# Altium PCB BMS.PcbDoc (part 3 of 3)
Units mm, origin at the board's own origin, x right, y up, seen from the top; angles counter-clockwise.
Board outline 84 x 70 mm, 4 copper layers (PWR, GND1, GND2, SIG), stack 1.586 mm thick; 200 components, 151 nets, 637 pads, 135 vias.
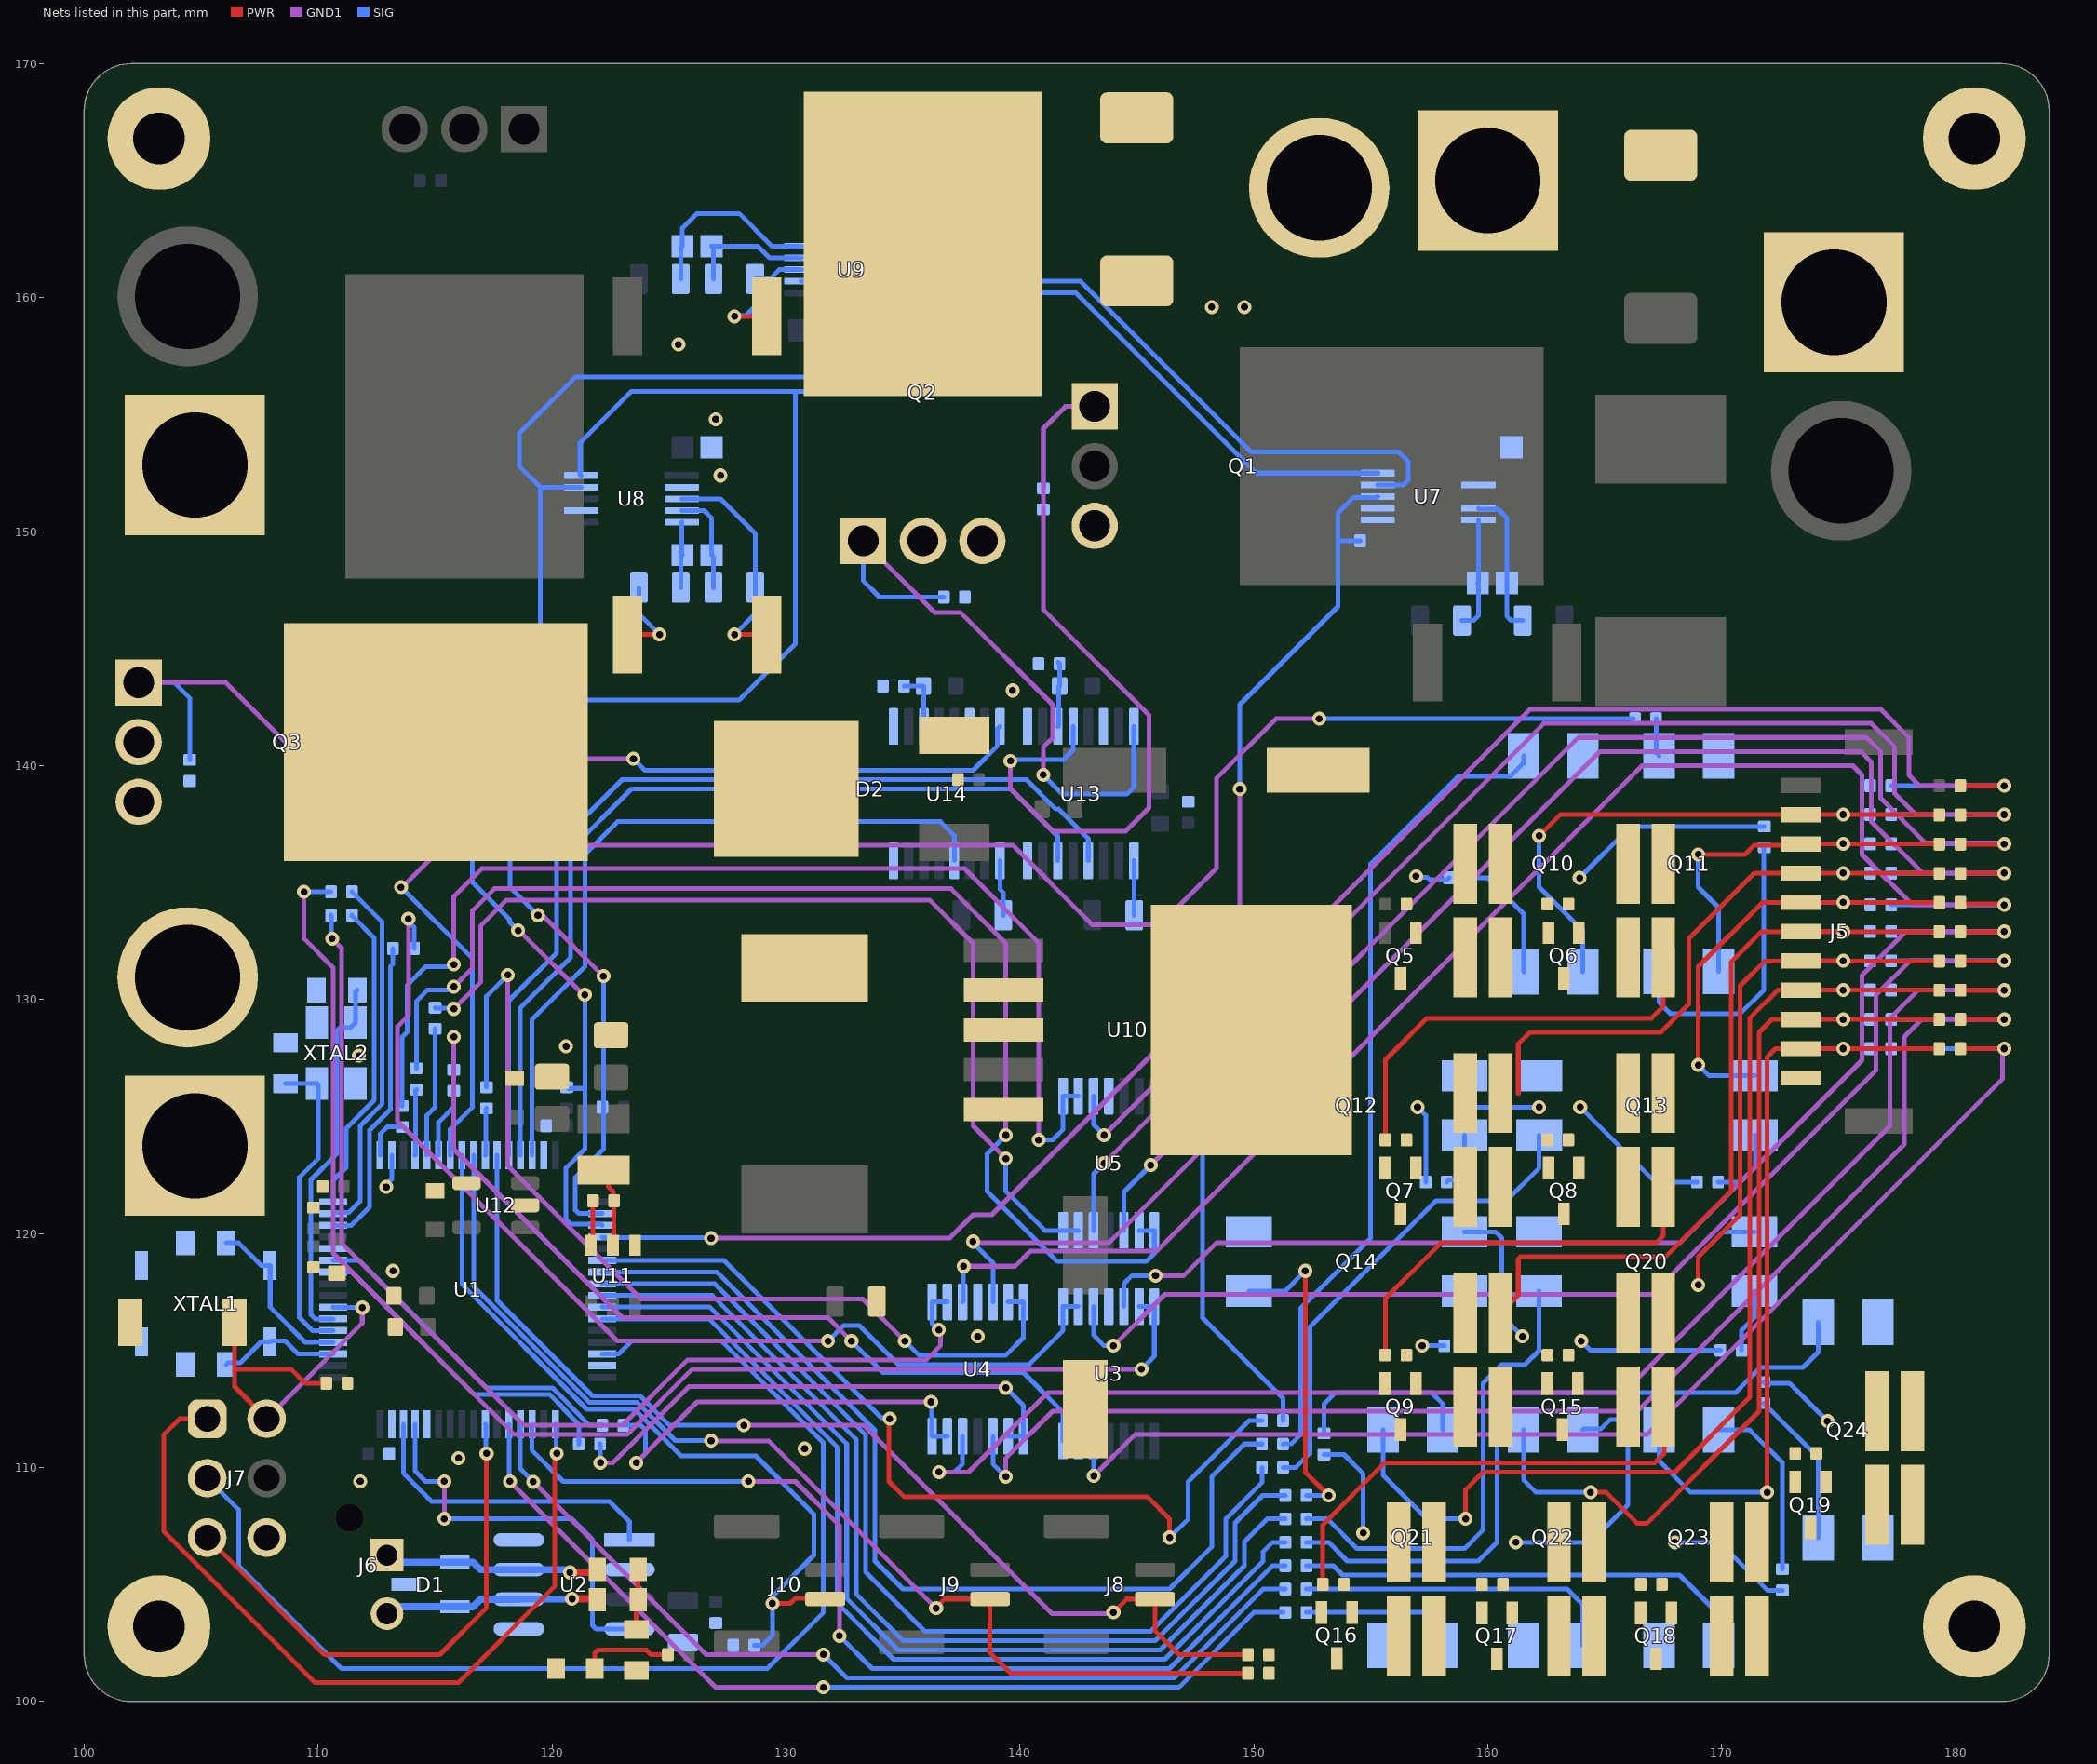
[diagram p4: the nets of this part, all layers, seen from the top]

## Via types
v1: diameter 0.6, hole 0.3, PWR to SIG, 135 vias

## Nets (pads, with @x,y where several pads share a name; then routed paths per layer and width w, separated by ;. In a path a pad name is that pad's centre, name@x,y a point inside that pad or via, vN(x,y) a via of type N, cw(c..) or ccw(c..) an arc to the next point about the centre after c; other vN are vias at no path point) (continued)
C1_ADC: R35.2 U1.22 | length 3
  SIG w0.2: U1.22@115.15,123.35 115.15,124.75 115.8,125.4 R35.2@115.8,126.1
C1_DIV: R21.1 R22.2 U3.5 | length 55.3
  PWR w0.2: R21.1@180.205,127.9 v1(182.08,127.9)
  GND1 w0.2: v1(143.157,109.638) 144.919,111.4 166.8,111.4 182,126.6 v1@182,127.8
  SIG w0.2: U3.5@143.15,111.13 143.15,109.644 v1(143.157,109.638) ; R22.2@177.25,127.9 v1(182.08,127.9)
C1_DIV_BUF: R35.1 U3.6 U3.7 | length 38.8
  GND1 w0.2: v1(115.8,128.4) 115.8,123.6 123,116.4 131.8,116.4 v1(132.8,115.4)
  SIG w0.2: R35.1@115.8,127 v1(115.8,128.4) ; v1(132.8,115.4) 134.146,114.054 140.146,114.054 141.85,112.35 U3.7@141.85,111.13 U3.6@142.5,111.13
C2_ADC: R27.2 U1.14 | length 13.3
  SIG w0.2: U1.14@110.65,120.35 111.425,120.35 112.2,121.125 112.2,124.409 113.089,125.297 113.089,131.4 113.2,131.511 R27.2@113.2,132.183
C2_DIV: R19.1 R20.2 U4.3 | length 62.6
  PWR w0.2: R19.1@180.205,129.151 v1(182.08,129.151)
  GND1 w0.2: v1(139.4,109.6) 139.4,110.4 141.4,112.4 166.4,112.4 177.8,123.8 177.8,128.4 178.551,129.151 v1(182.08,129.151)
  SIG w0.2: U4.3@138.85,111.33 138.85,110.15 v1(139.4,109.6) ; R20.2@177.25,129.151 v1(182.08,129.151)
C2_DIV_BUF: R29.1 U4.1 U4.2 | length 22.6
  GND1 w0.2: v1(122.069,110.199) 122.599,110.199 125.854,113.454 139.346,113.454 v1(139.4,113.4)
  SIG w0.2: R29.1@122.05,111 122.06,110.99 122.06,110.209 v1(122.069,110.199) ; v1(139.4,113.4) 140.15,112.65 U4.1@140.15,111.33 U4.2@139.5,111.33 U4.2@139.45,111.38
C3_ADC: R28.2 U1.15 | length 15.5
  SIG w0.2: U1.15@110.65,120.85 110.702,120.902 111.323,120.902 111.8,121.379 111.8,124.6 112.729,125.529 112.729,133.321 R28.2@111.45,134.6
C3_DIV: R17.1 R18.2 U4.5 | length 65.8
  PWR w0.2: R17.1@180.239,130.394 180.242,130.397 v1(182.08,130.397)
  GND1 w0.2: v1(136.546,109.8) 137.8,109.8 141.2,113.2 165.8,113.2 177.2,124.6 177.2,129.2 178.402,130.402 182.075,130.402 v1(182.08,130.397)
  SIG w0.2: v1(136.546,109.8) 137.2,109.8 137.55,110.15 U4.5@137.55,111.33 ; R18.2@177.25,130.402 182.075,130.402 v1(182.08,130.397)
C3_DIV_BUF: R30.1 U4.6 U4.7 | length 18.4
  GND1 w0.2: v1(123.6,110.2) 126.2,112.8 v1(136.2,112.8)
  SIG w0.2: R30.1@123.05,111.8 123.8,111.8 124,111.6 124,110.6 v1(123.6,110.2) ; v1(136.2,112.8) 136.225,112.775 136.225,111.355 U4.7@136.25,111.33 U4.6@136.9,111.33
C4_ADC: R29.2 U1.10 | length 14.1
  SIG w0.2: U1.10@110.65,118.35 111.45,118.35 116.689,113.111 119.905,113.111 120.491,112.525 120.491,112.5 121.15,111.841 R29.2@121.15,111
C4_DIV: R15.1 R16.2 U3.10 | length 55.7
  PWR w0.2: R15.1@180.205,131.646 180.209,131.649 182.076,131.649 v1(182.08,131.653)
  GND1 w0.2: v1(144,115.2) 146.2,117.4 167.019,117.4 176.6,126.981 176.6,130.197 178.056,131.653 v1(182.08,131.653)
  SIG w0.2: U3.10@143.15,116.87 143.15,115.65 143.599,115.201 143.999,115.201 v1(144,115.2) ; R16.2@177.25,131.653 v1(182.08,131.653)
C4_DIV_BUF: R27.1 U3.8 U3.9 | length 45.8
  GND1 w0.2: v1(113.861,133.447) 113.861,129.307 113.4,128.846 113.4,124.8 122.8,115.4 v1(131.8,115.4)
  SIG w0.2: v1(113.861,133.447) 113.861,133.339 114.1,133.1 R27.1@114.1,132.183 ; v1(131.8,115.4) 132.454,116.054 133.146,116.054 134.8,114.4 140.4,114.4 141.85,115.85 U3.8@141.85,116.87 U3.9@142.5,116.87
C5_ADC: R30.2 U1.11 | length 14.4
  SIG w0.2: U1.11@110.65,118.85 111.75,118.85 117.2,113.4 120.025,113.4 120.78,112.645 120.78,112.62 121.6,111.8 R30.2@122.15,111.8
C5_DIV: R13.1 R14.2 U3.12 | length 53.7
  PWR w0.2: R13.1@180.205,132.895 180.21,132.899 182.075,132.899 v1(182.08,132.904)
  GND1 w0.2: v1(145.8,118.2) 147,118.2 148.4,119.6 168.2,119.6 176,127.4 176,131.033 177.871,132.904 v1(182.08,132.904)
  SIG w0.2: U3.12@144.45,116.87 144.45,117.85 144.8,118.2 v1(145.8,118.2) ; R14.2@177.272,132.904 v1(182.08,132.904)
C5_DIV_BUF: R28.1 U3.13 U3.14 | length 59.6
  GND1 w0.2: v1(109.4,134.6) 109.4,132.6 110.65,131.35 110.65,119.15 118.4,111.4 123.2,111.4 126,114.2 v1(145.2,114.2)
  SIG w0.2: v1(109.4,134.6) R28.1@110.55,134.6 ; U3.13@145.1,116.87 U3.14@145.75,116.87 145.75,114.75 v1(145.2,114.2)
C6_ADC: R31.2 U1.16 | length 13.4
  SIG w0.2: U1.16@110.65,121.35 110.65,122.272 111.2,122.822 111.2,124.489 112.4,125.689 112.4,132.625 111.45,133.575 R31.2@111.45,133.6
C6_DIV: R11.1 R12.2 U4.10 | length 66.1
  PWR w0.2: R11.1@180.205,134.143 180.254,134.094 182.031,134.094 v1(182.08,134.044)
  GND1 w0.2: v1(137.6,118.6) 139.8,118.6 140.45,119.25 145.85,119.25 166.6,140 175.6,140 176,139.6 176,136.2 178.156,134.044 v1(182.08,134.044)
  SIG w0.2: U4.10@137.55,117.07 137.575,117.095 137.575,118.575 v1(137.6,118.6) ; R12.2@177.25,134.044 v1(182.08,134.044)
C6_DIV_BUF: R31.1 U4.8 U4.9 | length 47.1
  GND1 w0.2: v1(110.6,132.6) 111,132.2 111,119.6 118.8,111.8 123,111.8 125.8,114.6 136,114.6 136.6,115.2 136.6,115.813 v1(136.536,115.877)
  SIG w0.2: R31.1@110.55,133.6 110.575,133.575 110.575,132.625 v1(110.6,132.6) ; v1(136.536,115.877) 136.514,115.877 136.25,116.141 U4.8@136.25,117.07 U4.9@136.9,117.07
C7_ADC: R26.2 U1.26 | length 2
  SIG w0.2: U1.26@117.15,123.35 117.175,123.375 117.175,125.325 R26.2@117.2,125.35
C7_DIV: R9.1 R10.2 U4.12 | length 66.1
  PWR w0.2: R9.1@180.205,135.392 180.212,135.399 182.073,135.399 v1(182.08,135.406)
  GND1 w0.2: v1(138,119.654) 138.054,119.6 143.8,119.6 164.8,140.6 175.947,140.6 176.4,140.147 176.4,137.6 178.592,135.408 182.078,135.408 v1(182.08,135.406)
  SIG w0.2: v1(138,119.654) 138,119.6 138.85,118.75 U4.12@138.85,117.07 ; R10.2@177.25,135.406 v1(182.08,135.406)
C7_DIV_BUF: R26.1 U4.13 U4.14 | length 41.2
  GND1 w0.2: v1(118.113,131.051) 118.113,122.891 123.804,117.2 133.285,117.2 v1(135.085,115.4)
  SIG w0.2: R26.1@117.2,126.25 117.2,130.138 v1(118.113,131.051) ; v1(135.085,115.4) 135.685,114.8 139.4,114.8 140.15,115.55 U4.14@140.15,117.07 U4.13@139.5,117.07
C8_ADC: R33.2 U1.20 | length 2.8
  SIG w0.2: U1.20@114.15,123.35 114.175,123.375 114.175,126.125 R33.2@114.2,126.15
C8_DIV: R7.1 R8.2 U5.3 | length 57.1
  PWR w0.2: R7.1@180.205,136.64 180.208,136.643 182.077,136.643 v1(182.08,136.646)
  GND1 w0.2: v1(145.6,122.923) 163.877,141.2 176.2,141.2 176.8,140.6 176.8,138.6 178.711,136.689 182.037,136.689 v1(182.08,136.646)
  SIG w0.2: U5.3@144.45,120.13 144.45,121.773 v1(145.6,122.923) ; R8.2@177.261,136.657 182.069,136.657 v1(182.08,136.646)
C8_DIV_BUF: R33.1 U5.1 U5.2 | length 53.6
  GND1 w0.2: v1(115.8,130.55) 116.6,131.35 116.6,133.8 117.54,134.74 137.06,134.74 139.4,132.4 v1(139.4,124.2)
  SIG w0.2: R33.1@114.2,127.05 114.2,129.925 114.675,130.4 115.542,130.4 115.692,130.55 v1(115.8,130.55) ; v1(139.4,124.2) 138.6,123.4 138.6,121.8 141.6,118.8 145.4,118.8 145.75,119.15 U5.1@145.75,120.13 U5.2@145.1,120.13
C9_ADC: R34.2 U1.21 | length 5.5
  SIG w0.2: U1.21@114.65,123.35 114.65,125.05 115,125.4 R34.2@115,128.75
C9_DIV: R5.1 R6.2 U5.5 | length 58.8
  PWR w0.2: R5.1@180.205,137.889 180.214,137.899 182.071,137.899 v1(182.08,137.908)
  GND1 w0.2: v1(143.6,123) 162.4,141.8 176.4,141.8 177.4,140.8 177.4,138.8 178.292,137.908 v1(182.08,137.908)
  SIG w0.2: U5.5@143.15,120.13 143.15,122.55 v1(143.6,123) ; R6.2@177.25,137.908 v1(182.08,137.908)
C9_DIV_BUF: R34.1 U5.6 U5.7 | length 42.1
  GND1 w0.2: v1(115.8,129.6) 116.959,130.759 116.959,133.159 118.054,134.254 136.146,134.254 138,132.4 138,124.6 v1(139.4,123.2)
  SIG w0.2: R34.1@115,129.65 115.025,129.625 115.775,129.625 v1(115.8,129.6) ; v1(139.4,123.2) 139.4,121.8 141.07,120.13 U5.7@141.85,120.13 U5.6@142.5,120.13
C10_ADC: R32.2 U1.17 | length 2
  SIG w0.2: U1.17@112.65,123.35 112.65,124.25 112.95,124.55 R32.2@113.6,124.55
C10_DIV: R3.1 R4.2 U5.10 | length 56.9
  PWR w0.2: R3.1@180.205,139.138 v1(182.08,139.138)
  GND1 w0.2: v1(143.6,124.2) 161.8,142.4 176.8,142.4 178,141.2 178,139.6 178.462,139.138 v1(182.08,139.138)
  SIG w0.2: U5.10@143.15,125.87 143.15,124.65 v1(143.6,124.2) ; R4.2@177.25,139.138 v1(182.08,139.138)
C10_DIV_BUF: R32.1 U5.8 U5.9 | length 49.1
  GND1 w0.2: v1(115.8,131.5) 115.8,134.4 117,135.6 137.63,135.6 140.8,132.43 v1(140.8,124)
  SIG w0.2: R32.1@113.6,125.45 113.6,128.4 113.8,128.6 113.8,130.6 114.6,131.4 115.592,131.4 115.692,131.5 v1(115.8,131.5) ; v1(140.8,124) 141.4,124 141.85,124.45 U5.8@141.85,125.87 U5.9@142.5,125.87
CAN_H: D1.1 J6.1 R1.2 U2.7 | length 9.4
  PWR w0.305: v1(120.765,105.511) 121.806,105.511 R1.2@121.936,105.641
  SIG w0.305: J6.1@112.946,106.25 113.243,105.952 D1.1@115.854,105.952 116.629,105.952 116.946,105.635 120.56,105.635 120.685,105.511 v1(120.765,105.511)
CAN_L: D1.2 J6.2 R2.1 U2.6 | length 9.3
  PWR w0.305: v1(120.854,104.385) 121.903,104.385 R2.1@121.936,104.352
  SIG w0.305: J6.2@112.946,103.75 113.242,103.75 113.54,104.047 D1.2@115.854,104.047 116.629,104.047 116.946,104.365 U2.6@118.582,104.365 118.592,104.375 120.844,104.375 v1(120.854,104.385)
CAN_RX: U1.61 U2.4 | length 17
  GND1 w0.2: v1(115.4,107.8) v1(115.4,109.4)
  SIG w0.2: U1.61@114.15,111.85 114.15,109.85 114.6,109.4 v1(115.4,109.4) ; v1(115.4,107.8) 120.848,107.8 121.725,106.923 121.725,103.251 121.881,103.095 U2.4@123.309,103.095
CAN_TX: U1.62 U2.1 | length 13.4
  SIG w0.2: U1.62@113.65,111.85 113.65,109.75 114.854,108.546 122.454,108.546 123.309,107.691 U2.1@123.309,106.905
CB1_EN: R109.2 U1.43 | length 41.4
  SIG w0.2: U1.43@122.15,116.35 126.71,116.35 132.2,110.86 132.2,104.2 134.6,101.8 146.2,101.8 150.4,106 150.4,106.4 150.8,106.8 R109.2@151.35,106.8
CB2_EN: R108.2 U1.51 | length 41.8
  GND1 w0.2: v1(128.4,109.4) 130.4,109.4 132.285,107.515 v1(132.285,102.8)
  SIG w0.2: U1.51@119.15,111.85 119.15,110.725 120.475,109.4 v1(128.4,109.4) ; v1(132.285,102.8) 133.685,101.4 146.4,101.4 150.8,105.8 R108.2@151.35,105.8
CB3_EN: R107.2 U1.52 | length 39.9
  GND1 w0.2: v1(119.2,109.387) 126.587,102 v1(131.6,102)
  SIG w0.2: U1.52@118.65,111.85 118.65,109.937 v1(119.2,109.387) ; v1(131.6,102) 132.6,101 146.6,101 150.4,104.8 R107.2@151.35,104.8
CB4_EN: R106.2 U1.53 | length 40.5
  GND1 w0.2: v1(118.2,109.4) 127,100.6 v1(131.6,100.6)
  SIG w0.2: U1.53@118.15,111.85 118.175,111.825 118.175,109.425 v1(118.2,109.4) ; v1(131.6,100.6) 146.8,100.6 150,103.8 R106.2@151.252,103.8
CB5_EN: R105.2 U1.42 | length 42.1
  SIG w0.2: U1.42@122.15,116.85 126.75,116.85 132.6,111 132.6,104.4 134.8,102.2 146,102.2 149.6,105.8 149.6,106.825 150.575,107.8 R105.2@151.35,107.8
CB6_EN: R84.2 U1.41 | length 42.8
  SIG w0.2: U1.41@122.051,117.349 126.851,117.349 133,111.2 133,104.6 135,102.6 145.8,102.6 149.2,106 149.2,107.625 150.375,108.8 R84.2@151.35,108.8
CB7_EN: R83.2 U1.40 | length 42
  SIG w0.2: U1.40@122.15,117.85 126.95,117.85 133.4,111.4 133.4,105.536 135.936,103 145.6,103 148.8,106.2 148.8,107.8 150.35,109.35 R83.2@150.35,110
CB8_EN: R82.2 U1.38 | length 38.2
  PWR w0.2: v1(134.433,112.08) 134.4,112.046 134.4,109.4 135.05,108.75 145.45,108.75 146.4,107.8 v1(146.4,107)
  SIG w0.2: U1.38@122.15,118.85 127.35,118.85 134.076,112.124 134.388,112.124 v1(134.433,112.08) ; v1(146.4,107) 147.2,107.8 147.2,109.4 149.8,112 R82.2@150.35,112
CB9_EN: R81.2 U1.23 | length 73.8
  GND1 w0.2: v1(113.546,134.8) 113.6,134.8 115.4,136.6 139.69,136.6 143.09,133.2 146,133.2 148.4,135.6 148.4,139.45 150.95,142 v1(152.8,142)
  SIG w0.2: v1(113.546,134.8) 116.6,131.746 116.6,125.4 115.65,124.45 U1.23@115.65,123.35 ; v1(152.8,142) R81.2@166.225,142
CB10_EN: R80.2 U1.39 | length 41.4
  SIG w0.2: U1.39@122.15,118.35 127.05,118.35 133.8,111.6 133.8,106 135,104.8 146.4,104.8 148.2,106.6 148.2,109.6 149.6,111 R80.2@150.35,111
CELL1: J5.10 Q19.2 Q23.3 R21.2 R91.1 R92.1 R99.1 | length 32.5
  PWR w0.2: v1(171.946,108.937) 171.946,127.546 172.3,127.9 J5.10@173.371,127.9 v1(175.2,127.9) 175.205,127.905 179.145,127.905 R21.2@179.2,127.85
  SIG w0.2: Q23.3@167.33,111.61 167.33,110.27 168.663,108.937 v1(171.946,108.937)
CELL2: J5.9 Q18.2 Q22.3 R19.2 R89.1 R90.1 R98.1 | length 39.1
  PWR w0.2: v1(164.4,108.937) 165.063,108.937 166.4,107.6 166.8,107.6 171.6,112.4 171.6,128.6 172.15,129.15 J5.9@173.371,129.15 173.372,129.151 v1(175.2,129.151) 175.201,129.15 179.304,129.15 R19.2@179.305,129.151
  SIG w0.2: Q22.3@161.53,111.61 161.53,109.47 162.063,108.937 v1(164.4,108.937)
CELL3: J5.8 Q17.2 Q21.3 R17.2 R87.1 R88.1 R97.1 | length 46.1
  PWR w0.2: v1(159.054,107.8) 159.054,109.054 159.8,109.8 168,109.8 171.2,113 171.2,129.2 172.4,130.4 J5.8@173.371,130.4 173.373,130.402 v1(175.2,130.402) 175.202,130.4 179.303,130.4 R17.2@179.305,130.397
  SIG w0.2: Q21.3@155.53,111.61 155.53,109.67 157.4,107.8 v1(159.054,107.8)
CELL4: J5.7 Q16.2 Q20.3 R15.2 R85.1 R86.1 R96.1 | length 47
  PWR w0.2: R96.1@152.95,105 152.95,107.55 155.6,110.2 167.142,110.2 167.542,110.6 167.542,112.564 R86.1@167.506,112.6 ; v1(169,117.8) 169,119 170.788,120.788 170.788,130.588 171.85,131.65 J5.7@173.371,131.65 173.374,131.653 v1(175.2,131.653) 175.204,131.649 179.301,131.649 R15.2@179.305,131.646
  SIG w0.2: v1(169,117.8) 169,119 170.07,120.07 Q20.3@171.41,120.07
CELL5: J5.6 Q14.3 Q15.2 R13.2 R68.1 R69.1 R95.1 | length 38.4
  PWR w0.2: R68.1@160.553,116.6 161.308,117.355 161.308,118.915 161.393,119 167.6,119 170.4,121.8 170.4,131.6 171.7,132.9 J5.6@173.371,132.9 173.375,132.904 v1(175.2,132.904) 175.205,132.899 179.3,132.899 R13.2@179.305,132.895
  SIG w0.2: Q14.3@159.01,120.07 160.33,120.07 160.6,119.8 160.6,116.485 v1(161.485,115.6)
CELL6: J5.5 Q9.2 Q13.3 R11.2 R54.1 R67.1 R74.1 | length 35.8
  PWR w0.2: R74.1@155.625,114.8 155.625,117.225 158,119.6 167.2,119.6 167.506,119.906 R54.1@167.506,122 ; v1(169,127.2) 169,131.4 171.75,134.15 J5.5@173.371,134.15 173.376,134.155 v1(175.2,134.155) 175.206,134.149 179.299,134.149 R11.2@179.305,134.143
  SIG w0.2: v1(169,127.2) 169.46,126.74 Q13.3@171.42,126.74
CELL7: J5.4 Q8.2 Q12.3 R9.2 R52.1 R53.1 R73.1 | length 29.1
  PWR w0.2: 161.308,126 161.308,128.108 161.8,128.6 167.4,128.6 168.6,129.8 168.6,132.6 171.4,135.4 J5.4@173.371,135.4 173.377,135.406 v1(175.2,135.406) 175.207,135.399 179.298,135.399 R9.2@179.305,135.392
  SIG w0.2: Q12.3@159.01,126.74 159.01,125.79 159.4,125.4 v1(162.2,125.4)
CELL8: J5.3 Q7.2 Q11.3 R7.2 R25.1 R51.1 R72.1 | length 34.2
  PWR w0.2: R72.1@155.625,124 155.625,127.425 157.4,129.2 167,129.2 167.506,129.706 R51.1@167.506,131.8 ; v1(169,136.2) 171,136.2 171.4,136.6 173.321,136.6 J5.3@173.371,136.65 173.378,136.657 v1(175.2,136.657) 175.208,136.649 179.297,136.649 R7.2@179.305,136.64
  SIG w0.2: v1(169,136.2) 169,134.8 169.87,133.93 Q11.3@169.87,131.2
CELL9: J5.2 Q6.2 Q10.3 R5.2 R23.1 R24.1 R71.1 | length 24.1
  PWR w0.2: v1(162.2,137) 163.1,137.9 J5.2@173.371,137.9 173.379,137.908 v1(175.2,137.908) 175.209,137.899 179.296,137.899 R5.2@179.305,137.889 ; R71.1@162.55,134.075 R71.1@162.6,134.125
  SIG w0.2: v1(162.2,137) 162.2,134.8 164.07,132.93 Q10.3@164.07,131.19
CHG: Q2.1 R44.1 U13.16 | length 26.5
  GND1 w0.2: Q2.1@133.3,149.6 136.35,146.55 137.45,146.55 141.4,142.6 141.4,141.179 141,140.779 v1(141,139.6)
  SIG w0.2: Q2.1@133.3,149.6 133.3,147.9 134,147.2 R44.1@136.75,147.2 ; v1(141,139.6) 141.824,138.776 144.576,138.776 144.875,139.075 U13.16@144.875,141.67
CHG_EN: U1.28 U13.4 | length 40
  SIG w0.2: U1.28@118.15,123.35 118.15,129.95 120.2,132 120.2,136.6 123,139.4 140.275,139.4 141.538,138.137 141.663,138.137 142.925,136.875 U13.4@142.925,135.93
DSG: Q1.1 R43.1 U13.12 | length 38
  GND1 w0.2: v1(139.6,140.2) 139.6,139 141.4,137.2 144.525,137.2 145.525,138.2 145.525,142.15 141,146.675 141,154.4 141.95,155.35 Q1.1@143.2,155.35
  SIG w0.2: v1(139.6,140.2) 139.654,140.254 141.854,140.254 142.275,140.675 U13.12@142.275,141.67 ; R43.1@141,151.85 141,154.4 141.95,155.35 Q1.1@143.2,155.35
DSG_EN: U1.29 U13.6 | length 37.7
  SIG w0.2: U1.29@118.65,123.35 118.65,129.65 120.8,131.8 120.8,136.4 123.4,139 139.6,139 141.625,136.975 U13.6@141.625,135.93
ENGINE+: J2.2 Q3.3 R45.2
ENGINE+_SHUNTED: Q3.2 R40.2 R56.2 | length 3.7
  PWR w0.2: R56.2@123.225,145.6 v1(124.6,145.6)
  SIG w0.2: R40.2@123.71,147.6 123.71,146.49 v1(124.6,145.6)
ENGINE_DSG: Q3.1 R45.1 U14.16 | length 44.7
  GND1 w0.2: Q3.1@102.33,143.55 106.05,143.55 109.313,140.287 v1(123.479,140.287)
  SIG w0.2: Q3.1@102.33,143.55 103.85,143.55 104.51,142.89 R45.1@104.51,140.24 ; v1(123.479,140.287) 123.966,139.8 138,139.8 139.045,140.845 139.045,141.565 U14.16@139.15,141.67
ENGINE_DSG_EN: U1.30 U14.4 | length 31.5
  SIG w0.2: U1.30@119.15,123.35 119.15,129.15 121.4,131.4 121.4,136.2 122.8,137.6 136.6,137.6 137.2,137 U14.4@137.2,135.93
GND: C1.2 C2.1 C3.1 C4.1 C5.1 C6.2 C7.2 C8.2 C9.2 C10.2 C11.2 C12.1 C13.1 C14.2 C15.2 C16.2 C18.1 C20.1 C22.1 C23.2 C24.2 C25.2 C27.1 C28.1 C29.1 C30.1 C31.1 C32.1 C33.1 C34.1 D1.3 D2.3 D3.A D4.A J1.1 J2.1 J3.1 J4.1 J5.11 J7.6 LED1.1 pad.2 Q10.2 Q11.2 Q12.2 Q13.2 Q14.2 Q20.2 Q21.2 Q22.2 Q23.2 Q24.2 Q24.3 R4.1 R6.1 R8.1 R10.1 R12.1 R14.1 R16.1 R18.1 R20.1 R22.1 R64.2 R65.2 R66.2 R93.1 R94.1 SW1.2 U1.12 U1.18 U1.31 U1.47 U1.60 U1.63 U2.2 U2.5 U2.8 U3.11 U4.11 U5.11 U7.1 U7.2 U7.7 U8.2 U8.7 U9.1 U9.7 U10.3 U10.5 U10.6 U11.4 U12.2 U12.4 U13.9 U14.9 XTAL1.2 XTAL1.3 XTAL2.2 XTAL2.4 | length 6.4
  SIG w0.2: v1(112.914,121.984) 112.914,122.092 113.15,122.328 U1.18@113.15,123.35 ; U9.7@130.65,160.7 132.3,160.7 133.8,162.2 U9.1@134.95,162.2
  other v1: 111.8,109.4 116,110.4 130.8,110.8 138.2,115.6 113.2,118.4 111.746,127.6 120.6,128 139.69,143.21 127.2,152.4 127,154.8 125.4,158 148.2,159.6 149.6,159.6
IN1+: C17.2 R36.1 U7.9 | length 6.3
  SIG w0.2: U7.9@159.6,151 159.64,150.96 160.44,150.96 160.825,150.575 C17.2@160.825,147.8 160.825,146.375 161,146.2 R36.1@161.5,146.2
IN1-: C17.1 R37.1 U7.10 | length 4.9
  SIG w0.2: R37.1@158.9,146.2 159.4,146.2 159.6,146.4 159.6,147.775 C17.1@159.575,147.8 159.6,147.825 U7.10@159.6,150.5
IN2+: C19.2 R39.1 U8.9 | length 4.4
  SIG w0.2: U8.9@125.55,150.9 126.5,150.9 126.825,150.575 C19.2@126.825,149 126.9,148.925 R39.1@126.9,147.6
IN2-: C19.1 R40.1 U8.10 | length 2.8
  SIG w0.2: R40.1@125.5,147.6 125.5,148.925 C19.1@125.575,149 125.55,149.025 U8.10@125.55,150.4
IN3+: C21.2 R41.1 U9.9 | length 5.5
  SIG w0.2: R41.1@126.9,160.8 126.9,162.125 C21.2@126.825,162.2 128.8,162.2 129.3,161.7 U9.9@130.65,161.7
IN3-: C21.1 R42.1 U9.10 | length 8.1
  SIG w0.2: R42.1@125.5,160.8 125.5,162.125 C21.1@125.575,162.2 125.575,162.975 126.2,163.6 128,163.6 129.4,162.2 U9.10@130.65,162.2
NetC16_1: C16.1 R1.1 R2.2 | length 2.6
  PWR w0.2: C16.1@123.6,103.075 123.6,104.265 R2.2@123.686,104.352 ; R2.2@123.686,104.352 R1.1@123.686,105.641
NetC26_1: C26.1 L2.1 U11.5 | length 3.4
  PWR w0.2: L2.1@122.2,122.71 122.414,122.496 122.414,121.986 122.621,121.779 122.621,121.429 C26.1@122.65,121.4 ; U11.5@122.639,119.502 C26.1@122.639,121.389
NetC26_2: C26.2 U11.6 | length 1.9
  PWR w0.2: U11.6@121.75,119.499 C26.2@121.75,121.4
NetD2_2: D2.2 L1.1 U10.2
NetLED1_2: LED1.2 R110.1 | length 3.9
  PWR w0.2: LED1.2@121.826,101.4 121.826,102.059 121.967,102.2 124.025,102.2 124.225,102 R110.1@124.95,102
NetQ5_1: Q5.1 R70.2 R75.2 | length 1.5
  SIG w0.2: v1(156.938,135.262) 156.986,135.214 157.426,135.214 157.526,135.114 158.264,135.114 R75.2@158.35,135.2
NetQ5_3: Q5.3 R23.2 R24.2
NetQ6_1: Q6.1 R71.2 R76.2 | length 8.8
  SIG w0.2: v1(163.925,135.2) 166.122,137.397 R76.2@171.828,137.397
NetQ6_3: Q6.3 R25.2 R51.2
NetQ7_1: Q7.1 R72.2 R77.2 | length 3.3
  SIG w0.2: v1(157,125.4) 157.35,125.05 R77.2@157.35,122.2
NetQ7_3: Q7.3 R52.2 R53.2
NetQ8_1: Q8.1 R73.2 R78.2 | length 6.3
  SIG w0.2: v1(163.953,125.4) 167.153,122.2 R78.2@168.95,122.2
NetQ8_3: Q8.3 R54.2 R67.2
NetQ9_1: Q9.1 R74.2 R79.2 | length 1
  SIG w0.2: v1(157.2,115.2) R79.2@158.15,115.2
NetQ9_3: Q9.3 R68.2 R69.2
NetQ10_1: Q10.1 R80.1 | length 35.2
  SIG w0.2: R80.1@151.25,111 151.254,111.004 151.604,111.004 152,111.4 152,116.8 155,119.8 155,135.8 158.732,139.532 160.957,139.532 161.53,140.105 Q10.1@161.53,140.41
NetQ10_4: Q10.4 R75.1 | length 5.4
  SIG w0.2: R75.1@159.25,135.2 160,135.2 161.53,133.67 Q10.4@161.53,131.19
NetQ11_1: Q11.1 R81.1 | length 1.6
  SIG w0.2: R81.1@167.2,142 167.2,140.55 Q11.1@167.33,140.42
NetQ11_4: Q11.4 R76.1 | length 12.6
  SIG w0.2: Q11.4@167.33,131.2 167.33,129.87 167.8,129.4 170.8,129.4 171.8,130.4 R76.1@171.8,136.619
NetQ12_1: Q12.1 R82.1 | length 15.2
  SIG w0.2: Q12.1@149.79,124.2 148.6,124.2 147.8,123.4 147.8,116.4 151.25,112.95 R82.1@151.25,112
NetQ12_4: Q12.4 R77.1 | length 2.5
  SIG w0.2: R77.1@158.25,122.2 158.339,122.289 158.689,122.289 159.01,122.61 Q12.4@159.01,124.2
NetQ13_1: Q13.1 R83.1 | length 20.8
  SIG w0.2: R83.1@151.25,110 151.8,110 152.4,110.6 152.4,116 157.8,121.4 160.8,121.4 162.2,122.8 Q13.1@162.2,124.2
NetQ13_4: Q13.4 R78.1 | length 3.2
  SIG w0.2: R78.1@169.85,122.2 170.8,122.2 171.45,122.85 171.45,124.17 Q13.4@171.42,124.2
NetQ14_1: Q14.1 R84.1 | length 13.7
  PWR w0.2: v1(152.2,118.4) 152.2,109.8 v1(153.2,108.8)
  SIG w0.2: Q14.1@149.79,117.53 151.33,117.53 v1(152.2,118.4) ; R84.1@152.25,108.8 v1(153.2,108.8)
NetQ14_4: Q14.4 R79.1 | length 2.3
  SIG w0.2: Q14.4@159.01,117.53 159.05,117.49 R79.1@159.05,115.2
NetQ15_1: Q15.1 R95.2 R100.2 | length 6.1
  SIG w0.2: v1(164,115.4) 164.4,115 R100.2@169.95,115
NetQ15_3: Q15.3 R85.2 R86.2
NetQ16_1: Q16.1 R96.2 R101.2 | length 4.6
  SIG w0.2: R101.2@153,110.55 153.86,110.55 154.68,109.73 v1(154.68,107.191)
NetQ16_3: Q16.3 R87.2 R88.2
NetQ17_1: Q17.1 R97.2 R102.2 | length 8.2
  SIG w0.2: v1(161.2,106.8) 164.4,106.8 166,108.4 R102.2@166,111.15
NetQ17_3: Q17.3 R89.2 R90.2
NetQ18_1: Q18.1 R98.2 R103.2 | length 5.4
  SIG w0.2: v1(168,106.8) 169.902,106.8 171.952,104.75 R103.2@172.6,104.75
NetQ18_3: Q18.3 R91.2 R92.2
NetQ19_1: Q19.1 R99.2 R104.2 | length 3.4
  SIG w0.2: R104.2@171.8,113.65 171.85,113.6 172.905,113.6 v1(174.525,111.98)
NetQ19_3: Q19.3 R93.2 R94.2
NetQ20_1: Q20.1 R105.1 | length 20.2
  SIG w0.2: R105.1@152.25,107.8 153.146,107.8 154.409,106.537 159.017,106.537 159.8,107.32 159.8,113.6 160.6,114.4 161.6,114.4 162.19,114.99 Q20.1@162.19,117.53
NetQ20_4: Q20.4 R100.1 | length 2.8
  SIG w0.2: R100.1@170.85,115 170.85,115.85 171.4,116.4 171.4,117.52 Q20.4@171.41,117.53
NetQ21_1: Q21.1 R106.1 | length 7.1
  SIG w0.2: R106.1@152.25,103.8 157.827,103.8 158.07,103.557 Q21.1@158.07,102.39
NetQ21_4: Q21.4 R101.1 | length 7.9
  SIG w0.2: R101.1@153,111.45 153,112.715 153.485,113.2 157.6,113.2 158.07,112.73 Q21.4@158.07,111.61
NetQ22_1: Q22.1 R107.1 | length 13.8
  SIG w0.2: R107.1@152.25,104.8 163.4,104.8 164.07,104.13 Q22.1@164.07,102.39
NetQ22_4: Q22.4 R102.1 | length 2.1
  SIG w0.2: Q22.4@164.07,111.61 164.111,111.651 164.847,111.651 165.247,112.05 R102.1@166,112.05
NetQ23_1: Q23.1 R108.1 | length 19.8
  SIG w0.2: R108.1@152.25,105.8 153.4,105.8 153.8,105.4 168.2,105.4 169.87,103.73 Q23.1@169.87,102.39
NetQ23_4: Q23.4 R103.1 | length 7.9
  SIG w0.2: Q23.4@169.87,111.61 169.88,111.6 171.2,111.6 172.6,110.2 R103.1@172.6,105.65
NetQ24_1: Q24.1 R109.1 | length 30.7
  SIG w0.2: R109.1@152.25,106.8 153.2,106.8 154,106 159.6,106 160.4,106.8 160.4,112.8 160.8,113.2 170.6,113.2 170.8,113.4 170.8,113.406 171.665,114.271 173.471,114.271 174.13,114.93 Q24.1@174.13,116.21
NetQ24_4: Q24.4 R104.1 | length 6.7
  SIG w0.2: R104.1@171.8,112.75 171.825,112.75 171.975,112.6 171.975,112.575 174.13,110.42 Q24.4@174.13,106.99
OSC_H_IN: C12.2 U1.5 XTAL2.3 | length 13.4
  SIG w0.2: C12.2@108.6,126.4 XTAL2.3@109.95,126.4 110,126.35 110,123.2 109.2,122.4 109.2,116.4 109.75,115.85 U1.5@110.65,115.85
OSC_H_OUT: C11.1 U1.6 XTAL2.1 | length 16
  SIG w0.2: U1.6@110.65,116.35 109.864,116.35 109.689,116.525 109.689,122.289 110.8,123.4 110.8,128.659 110.941,128.8 111.389,128.8 XTAL2.1@111.6,129.011 111.6,130.325 C11.1@111.675,130.4
OSC_L_IN: C9.1 U1.3 XTAL1.1 | length 5.2
  SIG w0.2: C9.1@106.075,114.4 106.15,114.475 106.675,114.475 107.564,115.365 XTAL1.1@107.95,115.365 ; XTAL1.1@107.986,115.4 108.6,115.4 109.15,114.85 U1.3@110.65,114.85
OSC_L_OUT: C10.1 U1.4 XTAL1.4 | length 7.4
  SIG w0.2: C10.1@106.075,119.6 106.6,119.6 107.565,118.635 XTAL1.4@107.95,118.635 107.95,116.85 109.45,115.35 U1.4@110.65,115.35
P+: D4.C J4.2 Q2.2 R39.2 R41.2 R56.1 R57.1 U8.8 U9.8 | length 15.5
  PWR w0.2: v1(127.8,145.6) R56.1@129.175,145.6 ; v1(127.8,159.2) R57.1@129.175,159.2
  SIG w0.2: U8.8@125.55,151.4 127.2,151.4 128.69,149.91 R39.2@128.69,147.6 128.69,146.49 v1(127.8,145.6) ; v1(127.8,159.2) 127.835,159.235 128.289,159.235 128.69,159.636 R41.2@128.69,160.8 129.313,160.8 129.713,161.2 U9.8@130.65,161.2
PACK1: C33.2 R48.2 U13.11 | length 2.8
  SIG w0.2: U13.11@141.625,141.67 141.663,141.708 141.663,143.363 R48.2@141.7,143.4 C33.2@141.7,144.35 C33.2@141.643,144.407
PACK2: C31.2 R50.2 U14.11 | length 2.6
  SIG w0.2: C31.2@135.05,143.4 R50.2@135.875,143.4 135.888,143.388 135.888,141.682 U14.11@135.9,141.67
PACK_MON_INT: R38.1 U1.36 U7.3 | length 56.2
  GND1 w0.2: v1(126.8,119.8) 137,119.8 138,120.8 138.8,120.8 149.4,131.4 v1(149.4,139)
  SIG w0.2: U1.36@122.15,119.85 122.175,119.825 126.775,119.825 v1(126.8,119.8) ; v1(149.4,139) 149.4,142.6 153.6,146.8 153.6,149.6 ; R38.1@154.55,149.6 153.6,149.6 ; U7.3@155.3,151.5 155.26,151.46 154.26,151.46 153.6,150.8 153.6,149.6
PACK_MON_SCL: R58.1 U1.34 U7.5 U8.5 U9.5 | length 90.3
  GND1 w0.2: v1(119.4,133.6) 119.6,133.6 v1(122.2,131)
  SIG w0.2: v1(119.4,133.6) 118.2,134.8 118.2,140.4 120.6,142.8 128,142.8 130.4,145.2 130.4,156 ; U8.5@121.24,152.4 121.2,152.44 121.2,153.8 123.4,156 130.4,156 ; U1.34@122.15,120.85 121.15,120.85 121,121 121,122.4 122.2,123.6 122.2,125.15 v1(122.2,131) ; U7.5@155.3,152.5 150.1,152.5 142.4,160.2 U9.5@134.95,160.2 134.95,158.35 132.6,156 130.4,156
PACK_MON_SDA: R59.1 U1.35 U7.4 U8.4 U9.4 | length 89.2
  GND1 w0.2: v1(118.545,132.946) 118.6,132.946 121.346,130.2 v1(121.4,130.2)
  SIG w0.2: v1(118.545,132.946) 118.183,133.308 118.183,133.417 116.6,135 116.6,140.6 119.5,143.5 119.5,151.9 ; R59.1@120.63,126.25 120.68,126.2 121.4,126.2 ; U8.4@121.25,151.9 119.5,151.9 ; v1(121.4,130.2) 121.4,126.2 ; U1.35@122.15,120.35 122.1,120.4 120.8,120.4 120.6,120.6 120.6,122.8 121.4,123.6 121.4,126.2 ; U7.4@155.3,152 156.4,152 156.6,152.2 156.6,153 156.2,153.4 149.9,153.4 142.6,160.7 U9.4@134.95,160.7 133.9,160.7 133.6,160.4 133.6,158 132.2,156.6 121,156.6 118.6,154.2 118.6,152.8 119.5,151.9
PCHG: U13.14
PCHG_EN: U13.8
PDSG: U14.14
PDSG_EN: U14.8
RESET: C13.2 J7.2 SW1.1 U1.7 | length 16.6
  PWR w0.2: SW1.1@106.425,116.2 106.425,114.2 ; J7.2@107.8,112.08 106.425,113.455 106.425,114.2 ; C13.2@110.35,113.6 109.445,113.6 108.845,114.2 106.425,114.2
  GND1 w0.2: J7.2@107.8,112.08 111.889,116.169 v1(111.889,116.83)
  SIG w0.2: U1.7@110.65,116.85 110.66,116.84 111.88,116.84 v1(111.889,116.83)
S1: Q1.3 Q2.3 R43.2 R44.2
SWCLK: J7.3 U1.46 | length 50.8
  SIG w0.2: J7.3@105.26,109.54 106.6,108.2 106.6,105.8 111,101.4 129.2,101.4 131.6,103.8 131.6,111.051 127.251,115.4 123.4,115.4 122.851,114.851 U1.46@122.15,114.85 U1.46@122.15,114.85
SWDIO: J7.1 U1.49 | length 34.4
  PWR w0.2: J7.1@105.26,112.08 104.08,112.08 103.4,111.4 103.4,107.269 109.869,100.8 116,100.8 120.111,104.911 120.111,110.315 120.123,110.328 120.123,110.523 v1(120.2,110.6)
  SIG w0.2: U1.49@120.15,111.85 120.175,111.825 120.175,110.625 v1(120.2,110.6)
SWO: J7.5 U1.55 | length 22.7
  PWR w0.2: J7.5@105.26,107 110.26,102 115.2,102 117.2,104 v1(117.2,110.6)
  SIG w0.2: U1.55@117.15,111.85 117.175,111.825 117.175,110.625 v1(117.2,110.6)
THERM1: J8.1 R64.1 U1.27 | length 46
  PWR w0.2: v1(144,103.8) 144.575,104.375 J8.1@145.775,104.375 145.775,103.025 146.8,102 R64.1@149.75,102
  GND1 w0.2: v1(128.2,111.8) 133.326,111.8 141.376,103.75 v1@144.1,103.75
  SIG w0.2: U1.27@117.65,123.35 117.65,117.141 121.729,113.063 123.763,113.063 125.026,111.8 v1(128.2,111.8)
THERM2: J9.1 R65.1 U1.25 | length 47.3
  PWR w0.2: v1@136.4,104 136.775,104.375 J9.1@138.727,104.375 138.727,102.075 139.601,101.2 R65.1@149.75,101.2
  GND1 w0.2: v1(126.8,111.146) 126.823,111.123 129.277,111.123 v1(136.42,103.98)
  SIG w0.2: U1.25@116.65,123.35 116.65,117.733 121.609,112.774 123.643,112.774 125.271,111.146 v1(126.8,111.146)
THERM3: J10.1 R66.1 U1.24 | length 33.9
  PWR w0.2: v1(129.419,104.186) 130.186,104.186 130.4,104.4 131.653,104.4 J10.1@131.678,104.375
  SIG w0.2: U1.24@116.15,123.35 116.15,117.824 121.489,112.485 123.524,112.485 125.517,110.492 128.708,110.492 131.2,108 131.2,106.259 129.474,104.533 129.474,104.242 v1(129.419,104.186) 129.419,102.819 129.004,102.404 128.654,102.404 R66.1@128.65,102.4
VDDCP1: C35.2 U13.1 | length 2.3
  SIG w0.2: U13.1@144.875,135.93 144.883,135.923 144.883,133.608 C35.2@144.89,133.6
VDDCP2: C36.2 U14.1 | length 2.4
  SIG w0.2: U14.1@139.15,135.93 139.15,134.71 139.29,134.57 C36.2@139.29,133.6
pads on no net: D2.1 J5.12 J5.13 J6. J8.MP1 J8.MP2 J9.MP1 J9.MP2 J10.MP1 J10.MP2 U1.2 U1.37 U1.44 U1.45 U1.50 U1.54 U1.56 U1.57 U1.58 U1.59 U3.1 U3.2 U3.3 U5.12 U5.13 U5.14 U8.3 U9.3 U13.3 U13.7 U13.10 U13.13 U13.15 U14.3 U14.7 U14.10 U14.13 U14.15

## Polygon pours and split planes (outlines as drawn)
GND on SIG "GND_L04_P072" (solid, remove dead copper, pour order 72): 100,170 184,170 184,100 100,100
BMS3.3V on SIG "BMS3.3V_L04_P002" (solid, pour order 2): 128.2,106.6 128.2,104.6 cw(c127.4,104.6) 127.4,103.8 122.2,103.8 122.2,104.8 125,104.8 ccw(c125,105.2) 125.4,105.2 125.4,106.613 cw(c126.187,106.613) 126.187,107.4 127.4,107.4 cw(c127.4,106.6)
S1 on SIG "S1_L04_P066" (solid, pour order 66): 140.2,149.2 143.6,149.2 ccw(c143.6,150.162) 144.562,150.162 144.562,150.438 ccw(c143.6,150.438) 143.6,151.4 139.4,151.4 ccw(c139.4,149.2) 137.2,149.2 137.2,147.4 ccw(c137.8,147.4) 137.8,146.8 138.4,146.8 ccw(c138.4,147.8) 139.4,147.8 139.4,148.4 cw(c140.2,148.4)
AUX+ on SIG "AUX+_L04_P065" (solid, pour order 65): 113.8,168.4 113.4,168.4 ccw(c113.4,167.4) 112.4,167.4 112.4,165.4 ccw(c113.2,165.4) 113.2,164.6 114.4,164.6 ccw(c114.4,165) 114.8,165 114.8,167.4 ccw(c113.8,167.4)
ENGINE+ on SIG "ENGINE+_L04_P064" (solid, pour order 64): 104.6,139.8 102.2,139.8 ccw(c102.2,138.8) 101.2,138.8 101.2,138.4 ccw(c102.2,138.4) 102.2,137.4 104.2,137.4 ccw(c104.2,138.2) 105,138.2 105,139.4 ccw(c104.6,139.4)
ENGINE+ on PWR "ENGINE+_L01_P057" (solid, pour order 57): 101.8,139.6 107,139.6 cw(c107,138.8) 107.8,138.8 107.8,129 cw(c106.2,129) 106.2,127.4 102.4,127.4 cw(c102.4,129) 100.8,129 100.8,138.6 cw(c101.8,138.6)
GND on PWR "GND_L01_P070" (solid, remove dead copper, pour order 70): 100,170 184,170 184,100 100,100
BMS12V on PWR "BMS12V_L01_P048" (solid, pour order 48): 143,122.6 138,122.6 cw(c138,123.6) 137,123.6 137,125.34 cw(c137.86,125.34) 137.86,126.2 141.07,126.2 141.07,127.8 136.4,127.8 ccw(c136.4,126.6) 135.2,126.6 135.2,120.2 cw(c134.8,120.2) 134.8,119.8 133.968,119.8 cw(c133.968,120.168) 133.6,120.168 133.6,123.15 128,123.15 127.999,117.8 122.65,117.8 ccw(c122.65,117.484) 122.334,117.484 122.334,116.466 ccw(c122.6,116.466) 122.6,116.2 132.2,116.2 ccw(c132.2,117) 133,117 133,117.2 cw(c134,117.2) 134,118.2 136.2,118.2 ccw(c136.2,119) 137,119 cw(c138.341,119) 138.341,120.341 141.461,120.341 cw(c141.461,119.985) 141.818,119.978 141.767,117.234 ccw(c141.992,117.23) 141.99,117.004 143.585,116.988 ccw(c143.587,117.2) 143.8,117.2 143.804,121.795 ccw(c143.001,121.796)
AUX+ on PWR "AUX+_L01_P005" (solid, pour order 5): 103,156.4 107,156.4 ccw(c107,159.6) 110.2,159.6 110.2,161.6 cw(c111.6,161.6) 111.6,163 113,163 ccw(c113,164.856) 114.856,164.856 114.856,167.759 ccw(c114.161,167.759) 114.161,168.453 107.653,168.453 ccw(c107.653,167.6) 106.8,167.6 106.8,166.6 cw(c104.2,166.6) 104.2,164 103.2,164 ccw(c103.2,161.8) 101,161.8 101,158.4 ccw(c103,158.4)
BMS3.3V on PWR "BMS3.3V_L01_P069" (solid, pour order 69): 109.2,120.665 109.2,119 114,119 114,112.063 125,111.935 125,105 147,105 147,106.35 126.617,106.35 126.555,114.6 117,114.6 117,120.665
NetQ18_1 on PWR "NETQ18_1_L01_P035" (solid, pour order 35): 167.122,103.18 168.725,103.18 168.725,107.6 167.122,107.6
CELL3 on PWR "CELL3_L01_P038" (solid, pour order 38): 157.083,108.6 159.353,108.6 cw(c159.353,107.911) 160.042,107.911 160.042,103.056 158.717,103.056 ccw(c158.716,102.597) 158.258,102.597 158.258,101.1 157.083,101.1
B+ on PWR "B+_L01_P050" (solid, pour order 50): 176.6,156.2 172,156.2 cw(c172,157.65) 170.55,157.65 170.55,159.05 ccw(c169.2,159.05) 169.2,160.4 165.8,160.4 ccw(c165.8,159) 164.4,159 164.4,151.2 ccw(c166.6,151.2) 166.6,149 170.2,149 cw(c170.2,147.2) 172,147.2 172,144 172,138.8 ccw(c172.142,138.8) 172.142,138.658 174.058,138.658 ccw(c174.058,139.2) 174.6,139.2 174.6,142.6 cw(c176,142.6) 176,144 177.2,144 ccw(c177.2,145.6) 178.8,145.6 178.8,154 ccw(c176.6,154)
BMS+ on PWR "BMS+_L01_P052" (solid, pour order 52): 150.8,145.4 150.8,143.848 cw(c148.702,143.847) 150.435,142.664 145.947,135.758 ccw(c150.782,132.617) 145.017,132.617 cw(c143.948,132.617) 143.948,131.548 137.652,131.548 cw(c137.652,131.8) 137.4,131.8 137.4,134 cw(c137.725,134) 137.725,134.325 138.425,134.325 ccw(c138.425,137.55) 141.65,137.55 141.65,143.25 cw(c142.248,143.25) 142.248,143.848 143.048,143.848 ccw(c143.048,147.4) 146.6,147.4 146.6,150.6 ccw(c145.622,150.6) 145.622,151.578 143.073,151.578 cw(c143.073,152.85) 141.8,152.851 cw(c142.99,152.85) 142.99,154.041 145.536,154.041 ccw(c145.536,155.105) 146.6,155.105 146.6,157.4 cw(c147.6,157.4) 147.6,158.4 161.8,158.4 cw(c161.8,157.2) 163,157.2 163,147.8 cw(c162.2,147.8) 162.2,147 159,147 ccw(c159,146.2) 158.2,146.2 158.2,143 cw(c157.2,143) 157.2,142 155.2,142 cw(c155.2,143) 154.2,143 154.2,145.4 ccw(c153.4,145.4) 153.4,146.2 151.6,146.2 ccw(c151.6,145.4)
B+ on PWR "B+_L01_P012" (solid, pour order 12): 156.082,132.241 156.082,134.559 155.207,134.559 155.207,132.241
B+_FUSED on PWR "B+_FUSED_L01_P051" (solid, pour order 51): 170.2,146.4 162.6,146.4 162.6,142.2 170.2,142.2
NetD2_2 on PWR "NETD2_2_L01_P059" (solid, pour order 59): 134.13,142.27 127.27,142.27 ccw(c127.27,140.4) 125.4,140.4 125.4,129.83 141.07,129.83 141.07,130.97 137.603,130.996 cw(c137.607,131.603) 137,131.603 137,134.4 ccw(c136,134.4) 136,135.4 135.5,135.4 cw(c135.5,136.3) 134.6,136.3 134.6,141.8 ccw(c134.13,141.8)
BMS5V on PWR "BMS5V_L01_P061" (solid, pour order 61): 123.558,127.571 123.558,123.8 120.842,123.8 120.8,123.758 120.8,117.8 121.8,117.8 cw(c121.8,117.6) 122,117.6 122,116.4 cw(c121.8,116.4) 121.8,116.2 118.2,116.2 118.2,120.6 119.8,120.6 119.8,121.8 117.6,121.8 117.6,125.8 121.539,125.8 121.539,127.571
GND on PWR "GND_L01_P060" (solid, pour order 60): 119.501,121.6 119.501,120.899 113.8,120.899 113.8,122.8 117.4,122.8 117.4,121.6
CELL1 on PWR "CELL1_L01_P044" (solid, pour order 44): 171.464,111.121 173.279,111.121 cw(c173.279,110.927) 173.473,110.927 173.473,108.872 cw(c173.201,108.872) 173.198,108.6 173.005,108.602 ccw(c172.997,107.663) 172.058,107.663 172.058,103.056 172.058,101.1 170.883,101.1 170.883,110.54 cw(c171.464,110.54)
CELL2 on PWR "CELL2_L01_P034" (solid, pour order 34): 164.4,109.4 166.2,109.4 cw(c166.2,108.711) 166.889,108.711 166.889,103.056 165.563,103.056 ccw(c165.563,102.597) 165.105,102.597 165.105,101.1 163.93,101.1 163.93,108.93 cw(c164.4,108.93)
NetQ18_3 on PWR "NONET_L01_P006" (solid, pour order 33): 170.64,108.6 170.64,101 166.753,101 166.753,102.8 169.353,102.8 169.353,108.6
P+ on PWR "P+_L01_P053" (solid, pour order 53): 156.4,167.8 156.4,161.8 cw(c155.35,161.8) 155.35,160.75 148.95,160.75 cw(c148.95,161.443) 148.257,161.443 148.257,161.941 ccw(c147.497,161.941) 147.5,162.701 142.125,162.722 ccw(c142.121,161.802) 141.2,161.802 141.2,155.8 cw(c140,155.8) 140,154.6 138.2,154.6 ccw(c138.2,153.312) 136.911,153.311 136.911,144.111 cw(c136.2,144.111) 136.2,143.4 129,143.4 cw(c129,144) 128.4,144 128.4,165.82 cw(c132.214,165.82) 129.517,168.517 cw(c130.683,167.352) 130.683,169 141.6,169 155.2,169 cw(c155.2,167.8)
AUX+_SHUNTED on PWR "AUX+_SHUNTED_L01_P055" (solid, pour order 55): 115.08,163.08 115.08,167.88 cw(c115.694,167.88) 115.694,168.494 116.906,168.494 cw(c116.906,167.87) 117.53,167.87 117.53,163.07 ccw(c118.6,163.07) 118.6,162 123.4,162 cw(c123.4,161.306) 124.094,161.306 124.094,150.094 cw(c121.8,150.094) 121.8,147.8 111.4,147.8 cw(c111.4,148.4) 110.8,148.4 110.8,161.14 cw(c111.66,161.14) 111.66,162 114,162 ccw(c114,163.08)
ENGINE+_SHUNTED on PWR "ENGINE+_SHUNTED_L01_P056" (solid, pour order 56): 123.6,147.4 109.2,147.4 ccw(c109.2,146.4) 108.2,146.4 108.2,143 cw(c107.4,143) 107.4,142.2 101.6,142.2 ccw(c101.6,141.6) 101,141.6 101,140.4 ccw(c101.61,140.4) 101.61,139.79 107.41,139.79 cw(c107.41,139) 108.2,139 108.2,136.4 ccw(c109.2,136.4) 109.2,135.4 121.2,135.4 ccw(c121.2,136.4) 122.2,136.4 122.2,142.8 cw(c122.8,142.8) 122.8,143.4 123.4,143.4 ccw(c123.4,143.926) 123.926,143.926 123.926,147.074 ccw(c123.6,147.074)
S1 on PWR "S1_L01_P049" (solid, pour order 49): 145.2,151.4 137.2,151.4 137.2,145.8 145.2,145.8
GND on PWR "GND_L01_P047" (solid, pour order 47): 137.53,129.253 141.594,129.253 141.598,131 148.8,131 148.8,124.73 137.53,124.73 137.53,125.87 141.6,125.87 141.6,128.13 137.53,128.13
NetQ19_3 on PWR "NONET_L01_P006" (solid, pour order 46): 177.272,114.2 177.272,106.538 173.353,106.538 173.353,108.4 175.953,108.4 175.953,114.2
NetQ19_1 on PWR "NETQ19_1_L01_P045" (solid, pour order 45): 173.722,108.78 175.325,108.78 175.325,112.78 173.722,112.78
CELL4 on PWR "CELL4_L01_P042" (solid, pour order 42): 153.357,103.241 153.357,105.559 152.482,105.559 152.482,103.241
CELL6 on PWR "CELL6_L01_P041" (solid, pour order 41): 156.082,113.021 156.082,115.339 155.207,115.339 155.207,113.021
NetQ16_1 on PWR "NETQ16_1_L01_P040" (solid, pour order 40): 153.472,103.2 155.2,103.2 155.2,107.6 153.472,107.6
NetQ16_3 on PWR "NONET_L01_P006" (solid, pour order 39): 156.753,108.6 156.753,101 152.953,101 152.953,102.8 155.553,102.8 155.553,108.6
NetQ17_1 on PWR "NETQ17_1_L01_P037" (solid, pour order 37): 160.322,103.18 161.925,103.18 161.925,107.6 160.322,107.6
NetQ17_3 on PWR "NONET_L01_P006" (solid, pour order 36): 163.6,108.6 163.6,101 159.8,101 159.8,102.8 162.4,102.8 162.4,108.6
CELL4 on PWR "CELL4_L01_P032" (solid, pour order 32): 166.92,118.4 168.095,118.4 169.2,118.4 cw(c169.2,117.851) 169.75,117.85 169.749,116.989 168.095,117.008 168.095,110.8 166.92,110.8
CELL6 on PWR "CELL6_L01_P031" (solid, pour order 31): 166.92,127.8 168.095,127.8 169.2,127.8 cw(c169.2,127.251) 169.75,127.25 169.75,127.145 cw(c169.202,127.145) 169.195,126.598 168.607,126.605 ccw(c168.601,126.099) 168.095,126.099 168.095,120.2 166.92,120.2
CELL8 on PWR "CELL8_L01_P009" (solid, pour order 9): 166.92,137.6 168.095,137.6 169.2,137.6 cw(c169.2,137.051) 169.75,137.05 169.749,136.145 cw(c169.199,136.145) 169.193,135.595 168.605,135.602 ccw(c168.599,135.099) 168.095,135.099 168.095,130 166.92,130
NetQ15_1 on PWR "NETQ15_1_L01_P030" (solid, pour order 30): 163.122,112.98 164.725,112.98 164.725,116.98 163.122,116.98
NetQ9_1 on PWR "NETQ9_1_L01_P029" (solid, pour order 29): 156.197,112.98 157.8,112.98 157.8,116.98 156.197,116.98
CELL5 on PWR "CELL5_L01_P027" (solid, pour order 27): 159.93,118.4 162.2,118.4 cw(c162.2,117.711) 162.889,117.711 162.889,112.856 161.564,112.856 ccw(c161.563,112.397) 161.105,112.397 161.105,110.9 159.93,110.9
NetQ15_3 on PWR "NONET_L01_P006" (solid, pour order 26): 166.553,118.4 166.553,110.8 162.753,110.8 162.753,112.6 165.353,112.6 165.353,118.4
NetQ9_3 on PWR "NONET_L01_P006" (solid, pour order 25): 159.6,118.4 159.6,110.8 155.8,110.8 155.8,112.6 158.4,112.6 158.4,118.4
CELL7 on PWR "CELL7_L01_P024" (solid, pour order 24): 159.93,127.8 162.2,127.8 cw(c162.2,127.111) 162.889,127.111 162.889,122.256 161.564,122.256 ccw(c161.563,121.797) 161.105,121.797 161.105,120.3 159.93,120.3
NetQ7_3 on PWR "NONET_L01_P006" (solid, pour order 14): 159.6,127.8 159.6,120.2 155.8,120.2 155.8,122 158.4,122 158.4,127.8
NetQ8_3 on PWR "NONET_L01_P006" (solid, pour order 16): 166.553,127.8 166.553,120.2 162.753,120.2 162.753,122 165.353,122 165.353,127.8
NetQ7_1 on PWR "NETQ7_1_L01_P019" (solid, pour order 19): 156.197,122.2 157.8,122.2 157.8,126.2 156.197,126.2
NetQ8_1 on PWR "NETQ8_1_L01_P020" (solid, pour order 20): 163.15,122.2 164.753,122.2 164.753,126.2 163.15,126.2
CELL8 on PWR "CELL8_L01_P021" (solid, pour order 21): 156.082,122.241 156.082,124.559 155.207,124.559 155.207,122.241
CELL9 on PWR "CELL9_L01_P023" (solid, pour order 23): 159.977,137.6 162.2,137.6 cw(c162.2,136.934) 162.866,136.934 162.866,132.215 161.615,132.215 ccw(c161.615,131.752) 161.152,131.752 161.152,130 159.977,130
NetQ5_3 on PWR "NONET_L01_P006" (solid, pour order 6): 159.6,137.6 159.6,130 155.8,130 155.8,131.8 158.4,131.8 158.4,137.6
NetQ6_3 on PWR "NONET_L01_P006" (solid, pour order 7): 166.575,137.6 166.575,130 162.775,130 162.775,131.8 165.375,131.8 165.375,137.6
NetQ5_1 on PWR "NETQ5_1_L01_P010" (solid, pour order 10): 156.197,132.2 157.8,132.2 157.8,136 156.197,136
NetQ6_1 on PWR "NETQ6_1_L01_P011" (solid, pour order 11): 163.122,132.2 164.725,132.2 164.725,136 163.122,136
GND on GND2 "GND_L03_P075" (solid, pour order 75): 100,170 184,170 184,100 100,100
GND on GND1 "GND_L02_P076" (solid, remove dead copper, pour order 76): 100,170 184,170 184,100 100,100

## Silkscreen, mask and mechanical layers (free items; w line width, h text height)
Top Overlay:
  drawing of 10 lines, arcs and shapes, not listed
  text "ENG+ OUT" at 109.2,127.8 h1.52
  text "BMS" at 173.4,119 h3
  text "Rev. A" at 173.854,117.254 h1.52
  text "IO" at 101.95,111.55 h1
  text "CLK" at 100.75,108.95 h1
  text "SWO" at 100.75,106.55 h1
  text "3V3" at 116.55,100.95 h1
  text "THERMISTORS" at 133.55,100.55 h1
Bottom Overlay:
  drawing of 453 lines, arcs and shapes, not listed
  text "P+" at 153.8,158.6 h1.52
  text "AUX+ OUT" at 114.2,157.4 h1.52
  text "B+ IN" at 170.8,151.4 h1.52
  text "Aug 2025" at 177.6,117.6 h1 r270
  text "Desgined by / Caden Chan" at 179.6,112.4 h1 r270
  text "Serial  / Wire Debug" at 100.4,104.5 h1 r270
Mechanical 1:
  the board outline again, w0.254
Top Assembly:
  lines w0.254: 94.492,101.524 95,100 ; 94.492,168.476 95,170 ; 94.746,100 95.254,100 ; 94.746,170 95.254,170 ; 95,129.896 95,100 ; 95,140.104 95,170 ; 95.508,101.524 95,100 ; 95.508,168.476 95,170 ; 100,94.746 100,95.254 ; 101.524,94.492 100,95 ; 101.524,95.508 100,95 ; 134.896,95 100,95 ; 145.104,95 180,95 ; 178.476,94.492 180,95 ; 178.476,95.508 180,95 ; 180,94.746 180,95.254
  text "70 (mm)" at 95.914,130.15 h1.52 r90
  text "80 (mm)" at 135.15,94.086 h1.52

## Text inside footprints (layer, text, board x,y; h text height)
C23: Top Overlay "+" at 141.55,140.3 h1.22 r180
C24: Top Overlay "+" at 143.3,121.9 h1.22 r90
J5: Top Assembly "RefDes2" at 172.736,135.123 h1.27 r270
Q10: Bottom Overlay "*" at 161.6,139 h1.27 r90; Bottom Assembly "*" at 161.593,139.242 h1.27 r90
Q11: Bottom Overlay "*" at 167.4,139 h1.27 r90; Bottom Assembly "*" at 167.394,139.252 h1.27 r90
Q12: Bottom Overlay "*" at 151,124.2 h1.27 r180; Bottom Assembly "*" at 150.958,124.264 h1.27 r180
Q13: Bottom Overlay "*" at 163.6,124.2 h1.27 r180; Bottom Assembly "*" at 163.368,124.264 h1.27 r180
Q14: Bottom Overlay "*" at 151.2,117.6 h1.27 r180; Bottom Assembly "*" at 150.958,117.594 h1.27 r180
Q20: Bottom Overlay "*" at 163.6,117.8 h1.27 r180; Bottom Assembly "*" at 163.358,117.594 h1.27 r180
Q21: Bottom Overlay "*" at 158.2,103.6 h1.27 r270; Bottom Assembly "*" at 158.006,103.558 h1.27 r270
Q22: Bottom Overlay "*" at 164,103.8 h1.27 r270; Bottom Assembly "*" at 164.006,103.558 h1.27 r270
Q23: Bottom Overlay "*" at 169.8,103.8 h1.27 r270; Bottom Assembly "*" at 169.807,103.558 h1.27 r270
Q24: Bottom Overlay "*" at 174.153,114.8 h1.27 r90; Bottom Assembly "*" at 174.193,115.042 h1.27 r90